# Altium PCB slider_V01_displayboard.PcbDoc
Units mm, origin at the board's own origin, x right, y up, seen from the top; angles counter-clockwise.
Board outline 80 x 43 mm, 2 copper layers (Top Layer, Bottom Layer); 11 components, 31 nets, 63 pads, 7 vias.
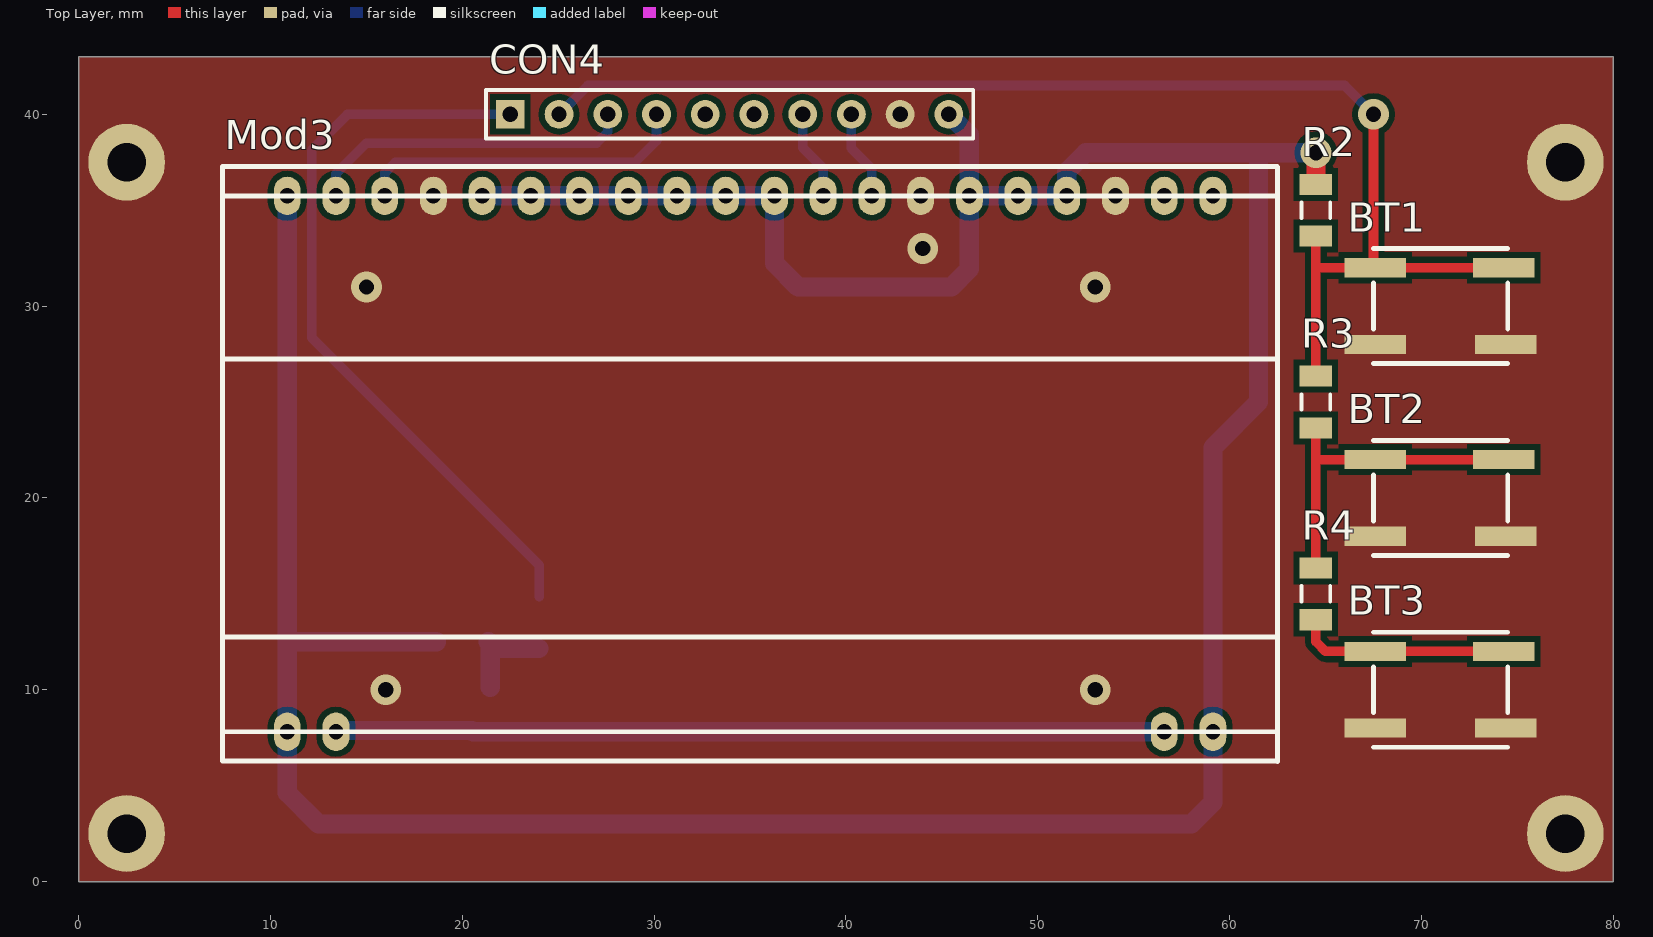
[diagram p0: Top Layer view]
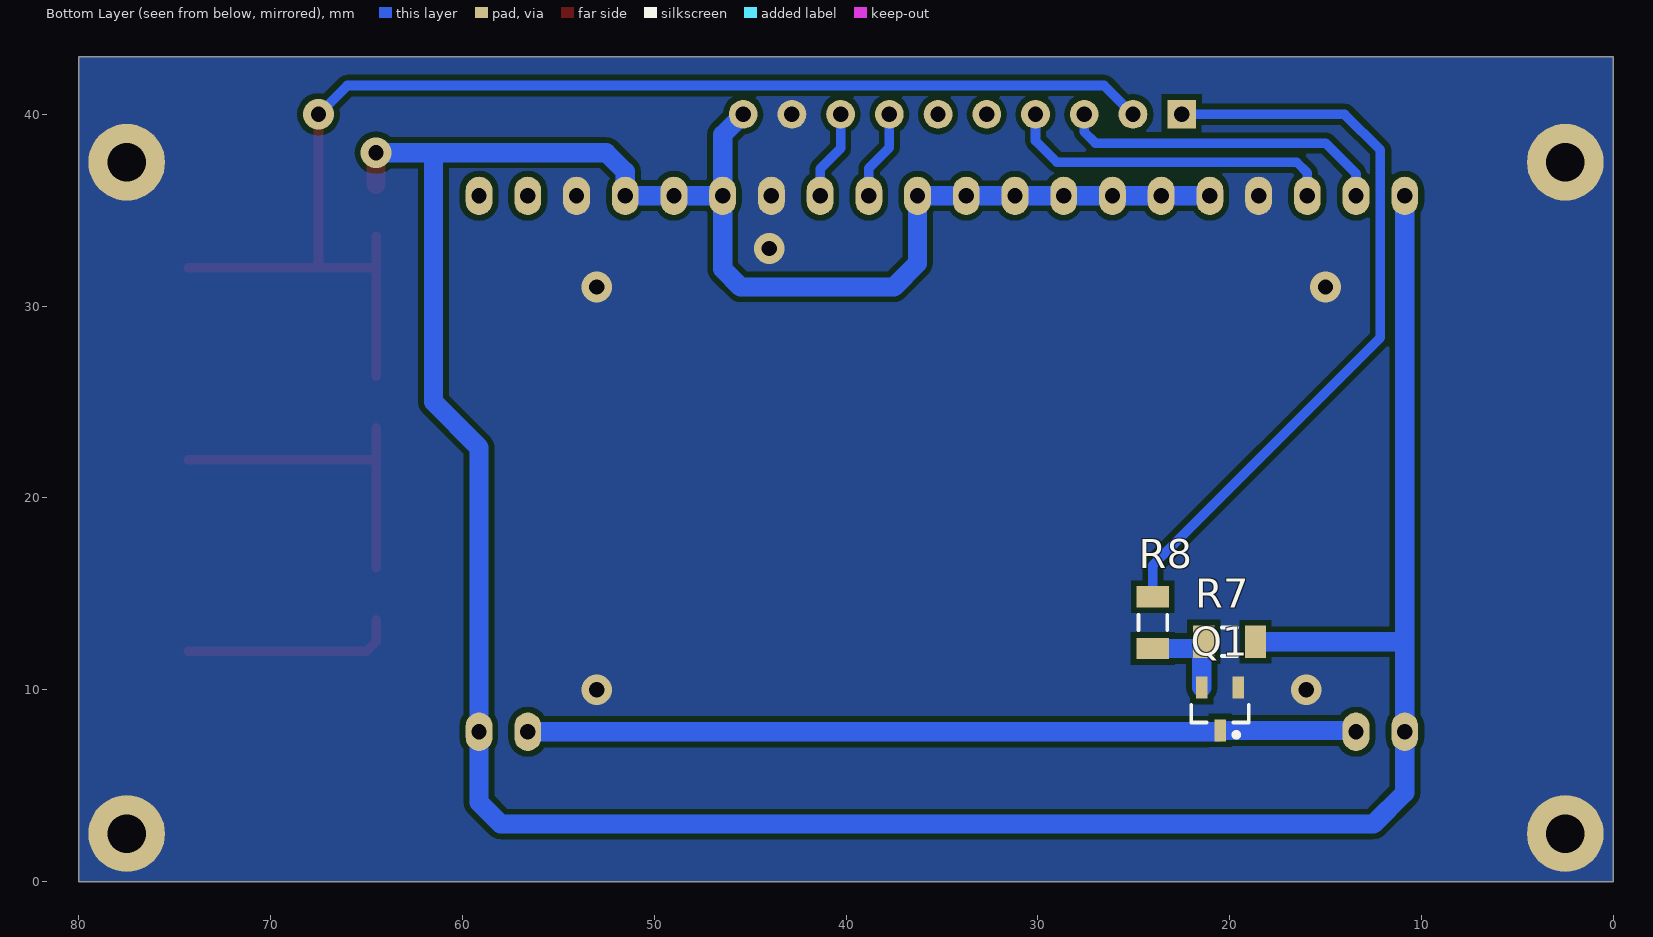
[diagram p1: Bottom Layer view, seen from below]

## Layer stack, top to bottom
Top Solder: solder mask 0.0102, Solder Resist, Dk 3.5
Top Layer: signal copper 0.0356
Dielectric1: dielectric 0.32, FR-4, Dk 4.8
Bottom Layer: signal copper 0.0356
Bottom Solder: solder mask 0.0102, Solder Resist, Dk 3.5

## Board outline
0,0 0,43 80,43 80,0

## Design rules (kind name [scope] priority, off if disabled: settings)
Clearance [All] p1: gap=0.3
PlaneConnect [All] p1: planeconnectstyle=Direct reliefexpansion=0.508 reliefentries=4 reliefconductorwidth=0.254 reliefairgap=0.254
PolygonConnect [All] p1: connectstyle=Direct reliefconductorwidth=0.254 reliefentries=4 polygonreliefangle="90 Angle" airgapwidth=0.254
RoutingVias [All] p1: holewidth=0.711 width=1.27 viastyle="Through Hole" minholewidth=0.711 minwidth=1.27 maxholewidth=0.711 maxwidth=1.27
SilkToSolderMaskClearance SilkscreenOverComponentPads [IsPad] p1: minsilkscreentomaskgap=0.254 clearancetoexposedcopper=TRUE
SolderMaskExpansion [All] p1: expansion=0.102
Width [All] p1: maxlimit=2 minlimit=0.2 preferedwidth=0.3
28 further rules are at their usual default settings.

## Components (designator, comment, footprint, x,y, rotation, side; value= is the part's Value field where it differs from the comment)
BT1 "EVQP0" EVQP0 71,30 r180 top
BT2 "EVQP0" EVQP0 71,20 r180 top
BT3 "EVQP0" EVQP0 71,10 r180 top
CON4 "Header 10" HDR1X10 22.5,40 r0 top
Mod3 "EA DOGMxxx-A" "EA DOGMxxx-A" 35,20 r0 top
Q1 "NPN" SOT23_N 20.5,9 r270 bottom
R2 "Res2" C1206 64.5,35 r90 top
R3 "Res2" C1206 64.5,25 r90 top
R4 "Res2" C1206 64.5,15 r90 top
R7 "Res2" C1206 20,12.5 r180 bottom
R8 "Res2" C1206 24,13.5 r90 bottom

## Footprints (in the part's own frame and the unit in brackets; to place one, negate y for a bottom-side part, rotate by r counter-clockwise, add the part's x,y. Pads: shape width x height; smd on the part's side, far side on the other; paste and mask are expansions set on the pad)
C1206 [mm] "Chip Capacitor, Body 3.2x1.6mm, IPC High Density"
  rect 1.1x1.7 smd: 1(-1.35,0) 2(1.35,0)
  silkscreen extent -0.4,-0.75 0.4,0.75, body extent -1.7,-0.9 1.7,0.9, height 1.3
"EA DOGMxxx-A" [mm]
  oval 1.4x2 hole 0.8: 1(-24.13,-12.19) 2(-21.59,-12.19) 19(21.59,-12.19) 20(24.13,-12.19) 21(24.13,15.75) 22(21.59,15.75) 23(19.05,15.75) 24(16.51,15.75) 25(13.97,15.75) 26(11.43,15.75) 27(8.89,15.75) 28(6.35,15.75) 29(3.81,15.75) 30(1.27,15.75) 31(-1.27,15.75) 32(-3.81,15.75) 33(-6.35,15.75) 34(-8.89,15.75) 35(-11.43,15.75) 36(-13.97,15.75) 37(-16.51,15.75) 38(-19.05,15.75) 39(-21.59,15.75) 40(-24.13,15.75)
  silkscreen extent -27.5,-13.75 27.5,17.28
EVQP0 [mm]
  rect 3.2x1 smd: 1(-3.3,-2) 2(3.4,-2) 3(3.4,2) 4(-3.4,2)
  silkscreen extent -3.5,-3 3.5,3
HDR1X10 [mm] "Connector; Header; 10 Position"
  rect 1.5x1.5 hole 0.8: 1(0,0)
  round 1.5 hole 0.8: 2(2.54,0) 3(5.08,0) 4(7.62,0) 5(10.16,0) 6(12.7,0) 7(15.24,0) 8(17.78,0) 9(20.32,0) 10(22.86,0)
  silkscreen extent -1.27,-1.27 24.13,1.27
SOT23_N [mm] "SOT23, 3-Leads, Body 2.9x1.3mm, Pitch 0.95mm, Lead Span 2.3mm - Reverse Pinning, IPC Medium Density"
  rect 1.15x0.6 smd: 1(1.125,0) 2(-1.125,-0.95) 3(-1.125,0.95)
  silkscreen extent -0.2,-1.5 1.47,1.5, body extent -0.7,-1.5 0.7,1.5, height 1.1

## Part data
CON4: "Header, 10-Pin"
Q1: "NPN Bipolar Transistor"
R2 R3 R4 R7 R8: "Resistor"

## Free pads (board coordinates)
  round 4 hole 2: 0(2.5,2.5) 0(2.5,37.5) 0(77.5,2.5) 0(77.5,37.5)

## Via types
v1: diameter 1.6, hole 0.8, Top Layer to Bottom Layer, 7 vias

## Nets (pads, with @x,y where several pads share a name; then routed paths per layer and width w, separated by ;. In a path a pad name is that pad's centre, name@x,y a point inside that pad or via, vN(x,y) a via of type N, cw(c..) or ccw(c..) an arc to the next point about the centre after c; other vN are vias at no path point)
3V3: 
+5V: CON4.10 Mod3.1 Mod3.20 Mod3.24 Mod3.25 Mod3.26 Mod3.30 Mod3.31 Mod3.32 Mod3.33 Mod3.34 Mod3.35 Mod3.36 Mod3.40 R2.2 R7.2 | length 182.9
  Top Layer w1: R2.2 v1(64.5,38)
  Bottom Layer w1: Mod3.40 10.87,12.5 ; R7.2 10.87,12.5 ; Mod3.36 Mod3.35 Mod3.34 Mod3.33 Mod3.32 Mod3.31 Mod3.30 36.27,32.23 37.5,31 45.5,31 46.43,31.93 Mod3.26 ; CON4.10 46.43,38.93 Mod3.26 ; v1(64.5,38) 61.5,38 ; 10.87,12.5 Mod3.1 10.87,4.63 12.5,3 58,3 59.13,4.13 Mod3.20 59.13,22.63 61.5,25 61.5,38 ; Mod3.26 Mod3.25 Mod3.24 51.51,37.01 52.5,38 61.5,38
+9V: 
+12V: 
BL: CON4.1 R8.2 | length 39.3
  Bottom Layer w0.5: CON4.1 14,40 12.144,38.144 12.144,28.356 24,16.5 R8.2
CLK: CON4.7 Mod3.29 | length 4.7
  Bottom Layer w0.5: CON4.7 37.74,38.26 38.81,37.19 Mod3.29
CS: CON4.4 Mod3.38 | length 17.4
  Bottom Layer w0.5: Mod3.38 15.95,36.95 16.5,37.5 29,37.5 30.12,38.62 CON4.4
GND: BT1.3 BT1.4 BT2.3 BT2.4 BT3.3 BT3.4 CON4.9 Mod3.23 Mod3.27 Mod3.37 pad.0 Q1.3
  other v1: 16,10 53,10 15,31 53,31 44,33
NetBT2_1: BT2.1 BT2.2 R3.1 R4.2 | length 17.1
  Top Layer w0.5: R4.2 64.5,22 ; R3.1 64.5,22 ; BT2.1 BT2.2 64.5,22
NetBT3_1: BT3.1 BT3.2 R4.1 | length 11.2
  Top Layer w0.5: R4.1 64.5,12.5 65,12 BT3.2 BT3.1
NetCON5_5: 
NetCON5_6: 
NetIC1_1: 
NetIC1_8: 
NetMod1_1: 
NetMod1_14: 
NetMod1_15: 
NetMod1_16: 
NetMod2_5: 
NetMod2_11: 
NetMod2_12: 
NetMod2_13: 
NetMod2_14: 
NetMod3_2: Mod3.2 Mod3.19 Q1.1 | length 43.2
  Bottom Layer w1: Mod3.2 13.475,7.875 Q1.1 20.565,7.81 Mod3.19
NetQ1_2: Q1.2 R7.1 R8.1 | length 5.1
  Bottom Layer w1: R7.1 R7.1@21.45,12.4 ; Q1.2 R7.1@21.45,12.4 ; R8.1 21.7,12.15 R7.1@21.45,12.4
RESET: 
RS: CON4.3 Mod3.39 | length 17.1
  Bottom Layer w0.5: Mod3.39 13.41,36.91 15,38.5 27,38.5 27.58,39.08 CON4.3
RXD: 
SI: CON4.8 Mod3.28 | length 4.7
  Bottom Layer w0.5: CON4.8 40.28,38.22 41.35,37.15 Mod3.28
TL: BT1.1 BT1.2 CON4.2 R2.1 R3.2 | length 68.8
  Top Layer w0.5: R3.2 64.5,32 ; R2.1 64.5,32 ; v1(67.5,40) 67.5,32.1 BT1.2 ; BT1.1 BT1.2 ; 64.5,32 BT1.2
  Bottom Layer w0.5: CON4.2 26.54,41.5 66,41.5 v1(67.5,40)
TXD: 
pads on no net: CON4.5 CON4.6 Mod3.21 Mod3.22

## Polygon pours and split planes (outlines as drawn)
GND on Bottom Layer "Top Layer-No Net" (solid, pour order 2): 0,43 0,0 80,0 80,43 0,43
GND on Top Layer "Top Layer-No Net" (solid, pour order 4): 0,43 0,0 80,0 80,43 0,43

## Silkscreen, mask and mechanical layers (free items; w line width, h text height)
Mechanical 1:
  the board outline again, w0.254
Mechanical 13:
  lines w0.254: 44.5,-50 62.5,-50 62.5,-40 44.5,-40 44.5,-50